# Altium PCB PCB.PcbDoc
Units mm, origin at the board's own origin, x right, y up, seen from the top; angles counter-clockwise.
Board outline 35 x 35 mm, 2 copper layers (L1, L2), stack 1.52 mm thick; 37 components, 31 nets, 124 pads, 25 vias.
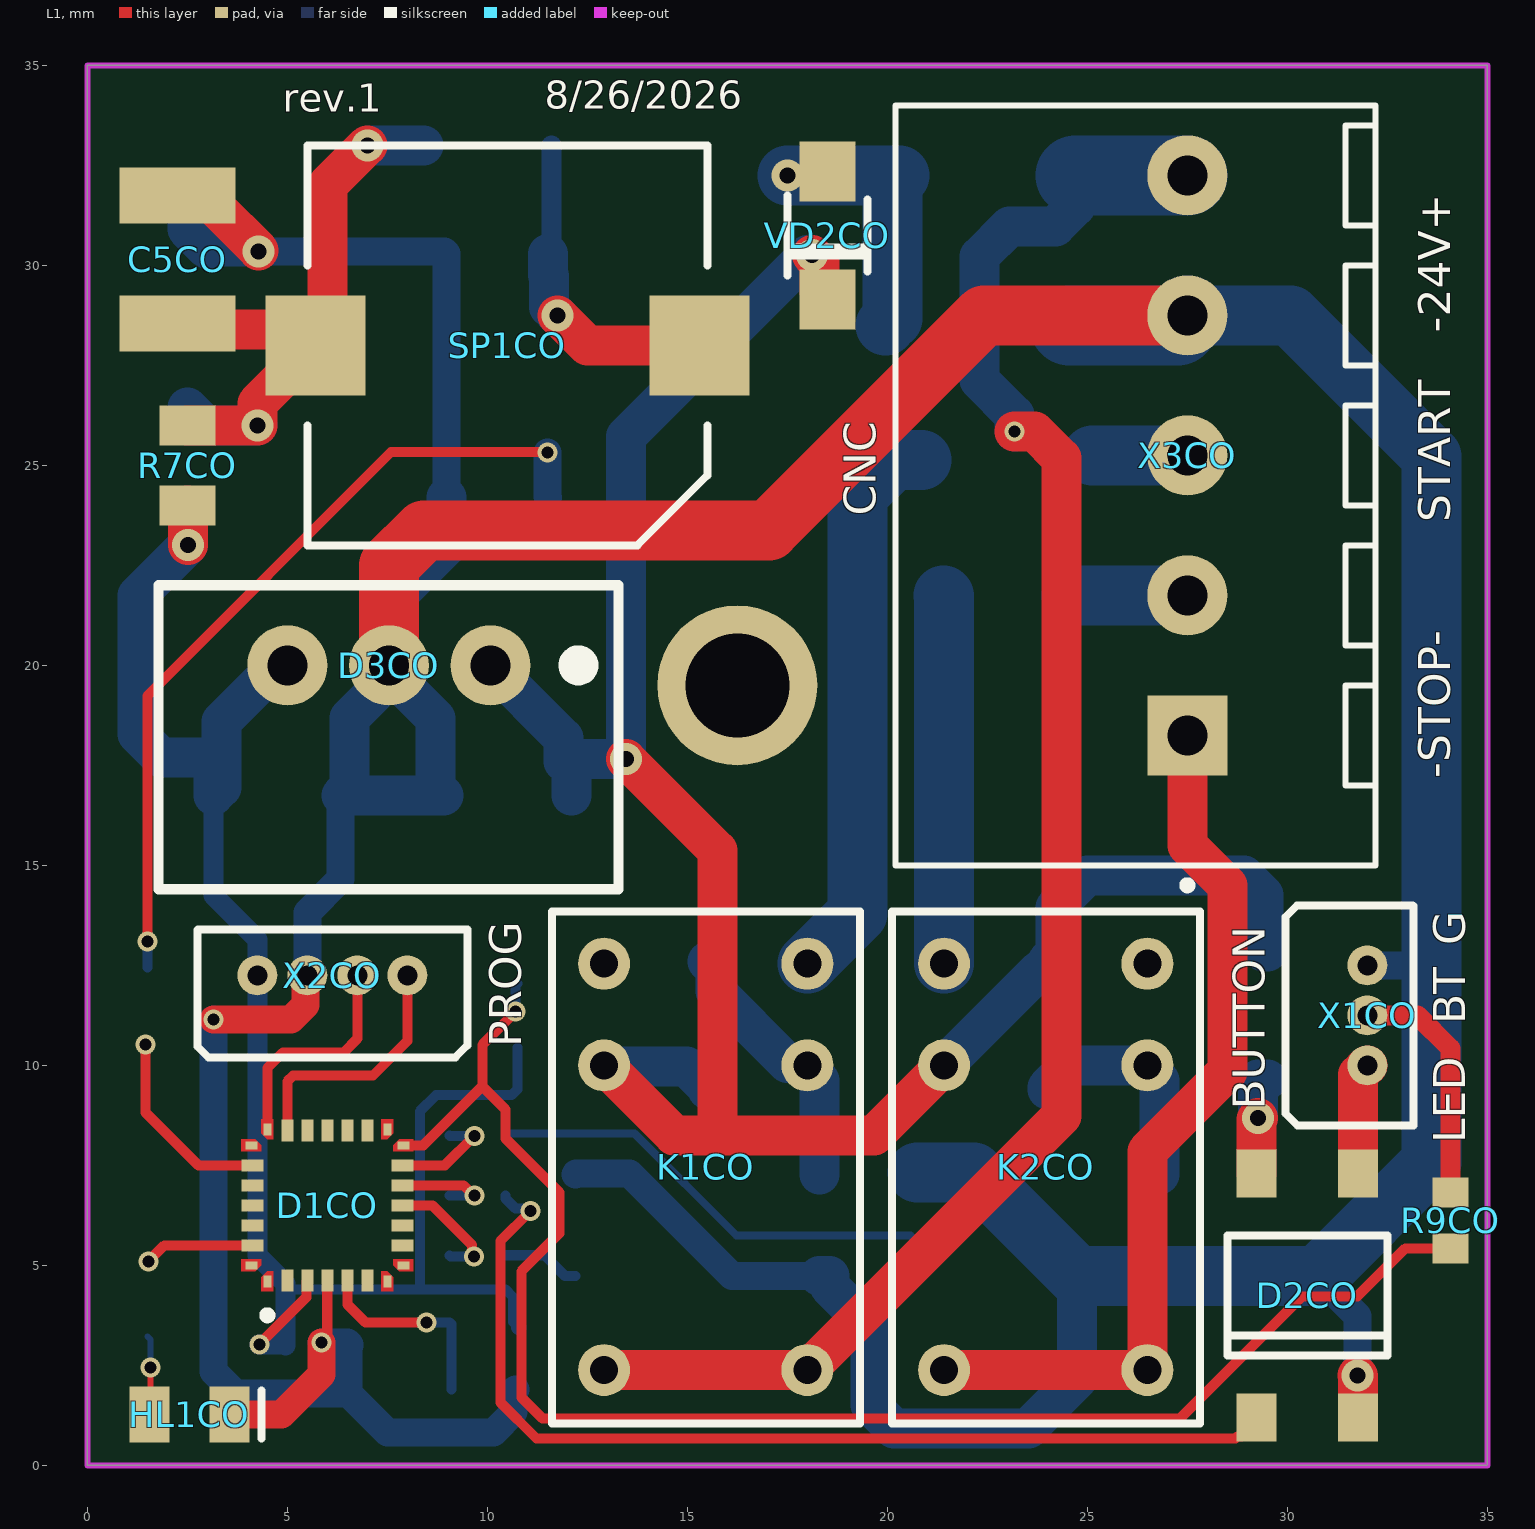
[diagram p0: L1 view]
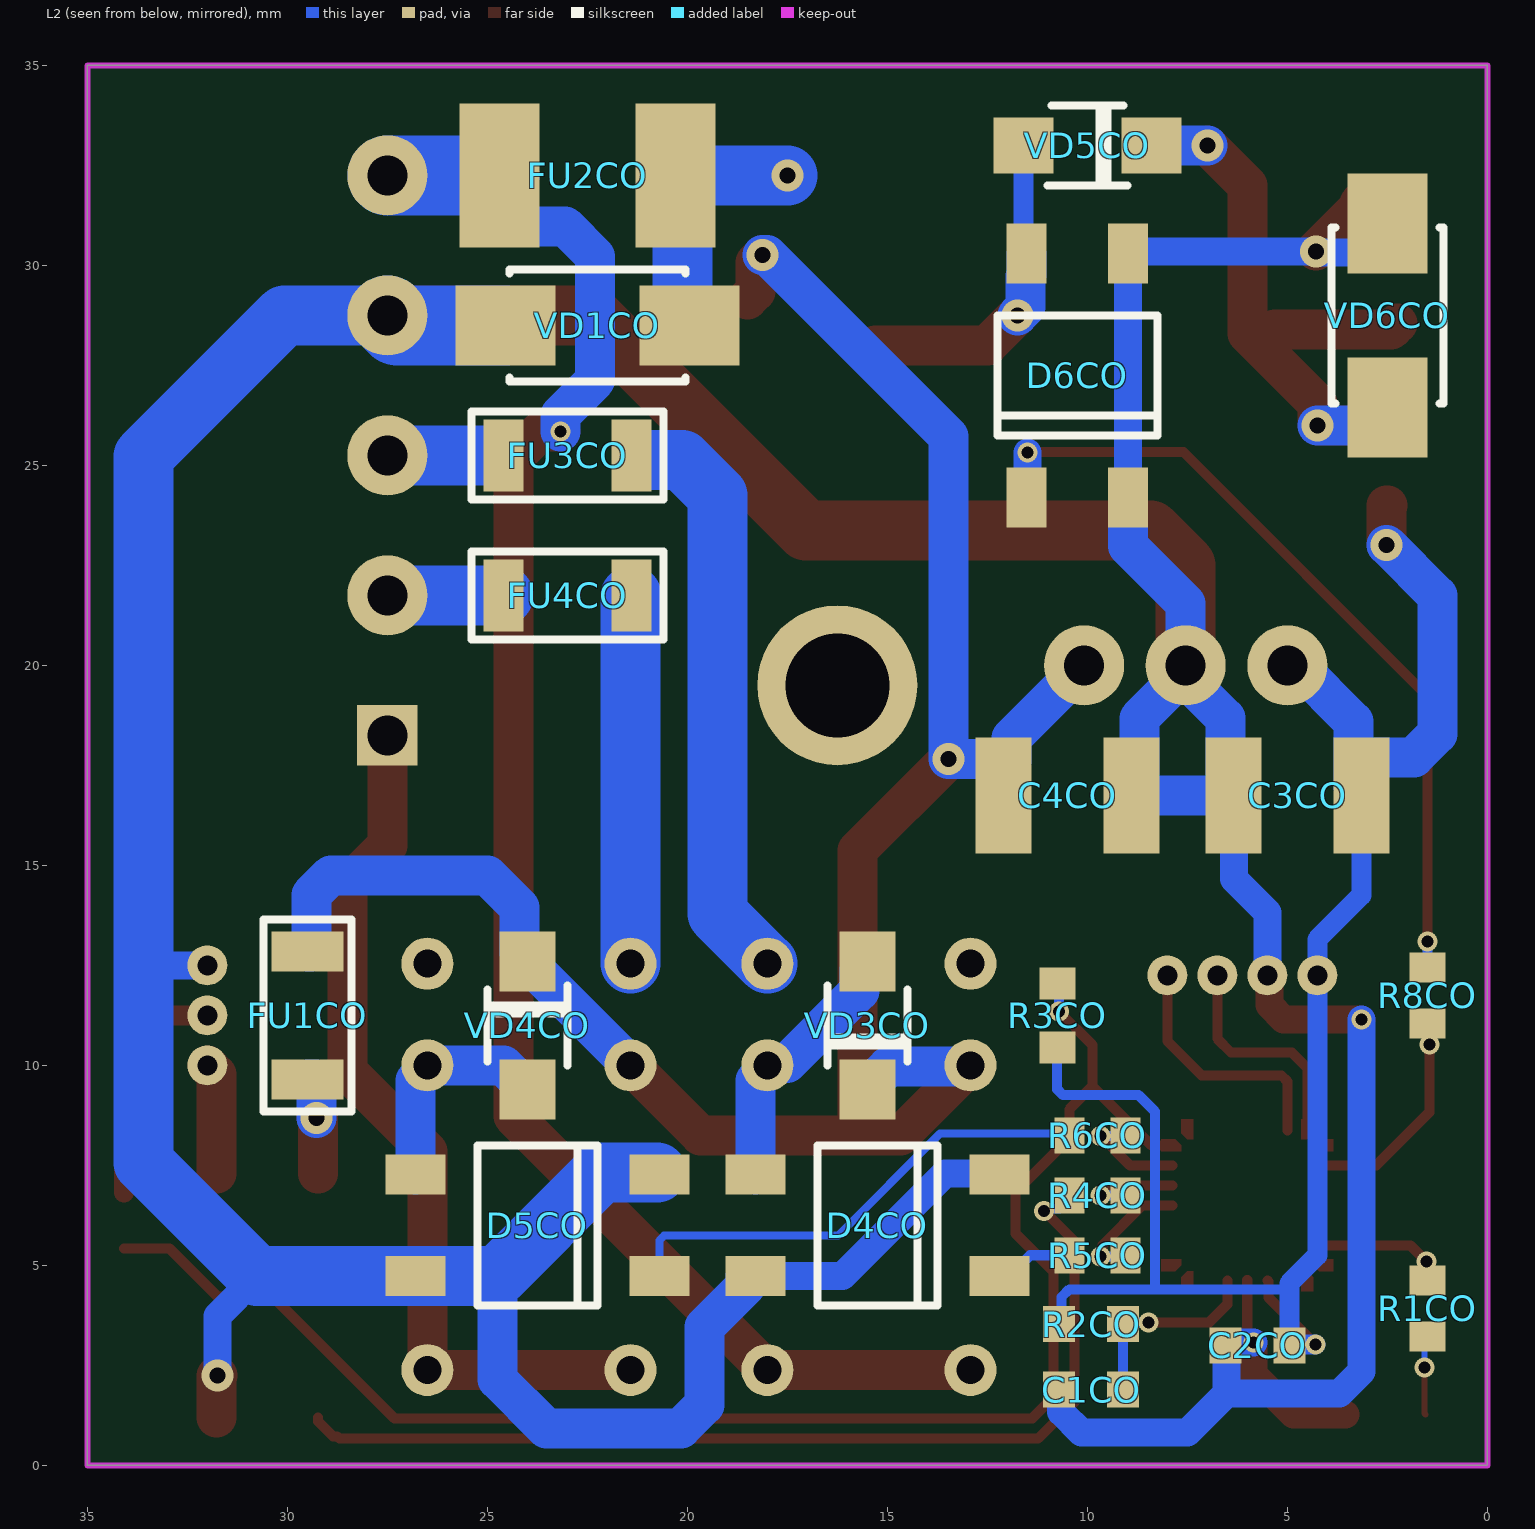
[diagram p1: L2 view, seen from below]
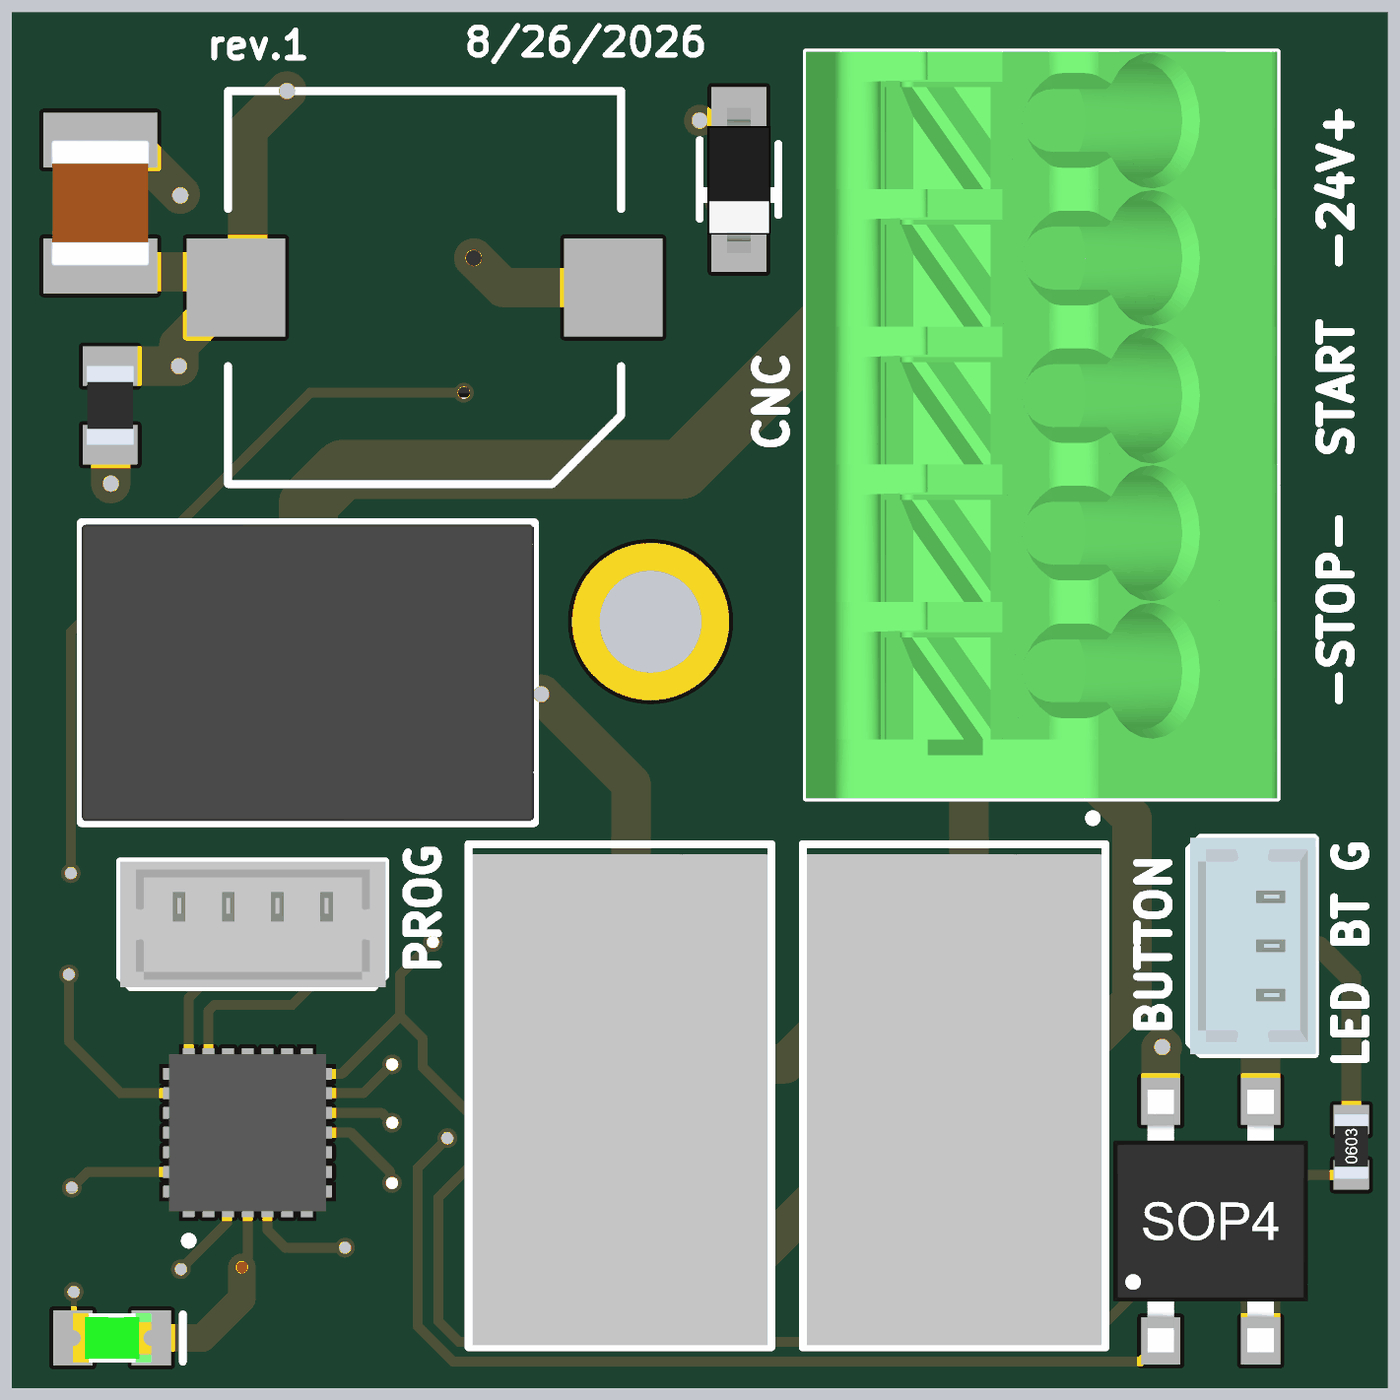
[diagram p2: 3D render of the assembled board from above, using the file's embedded part models]
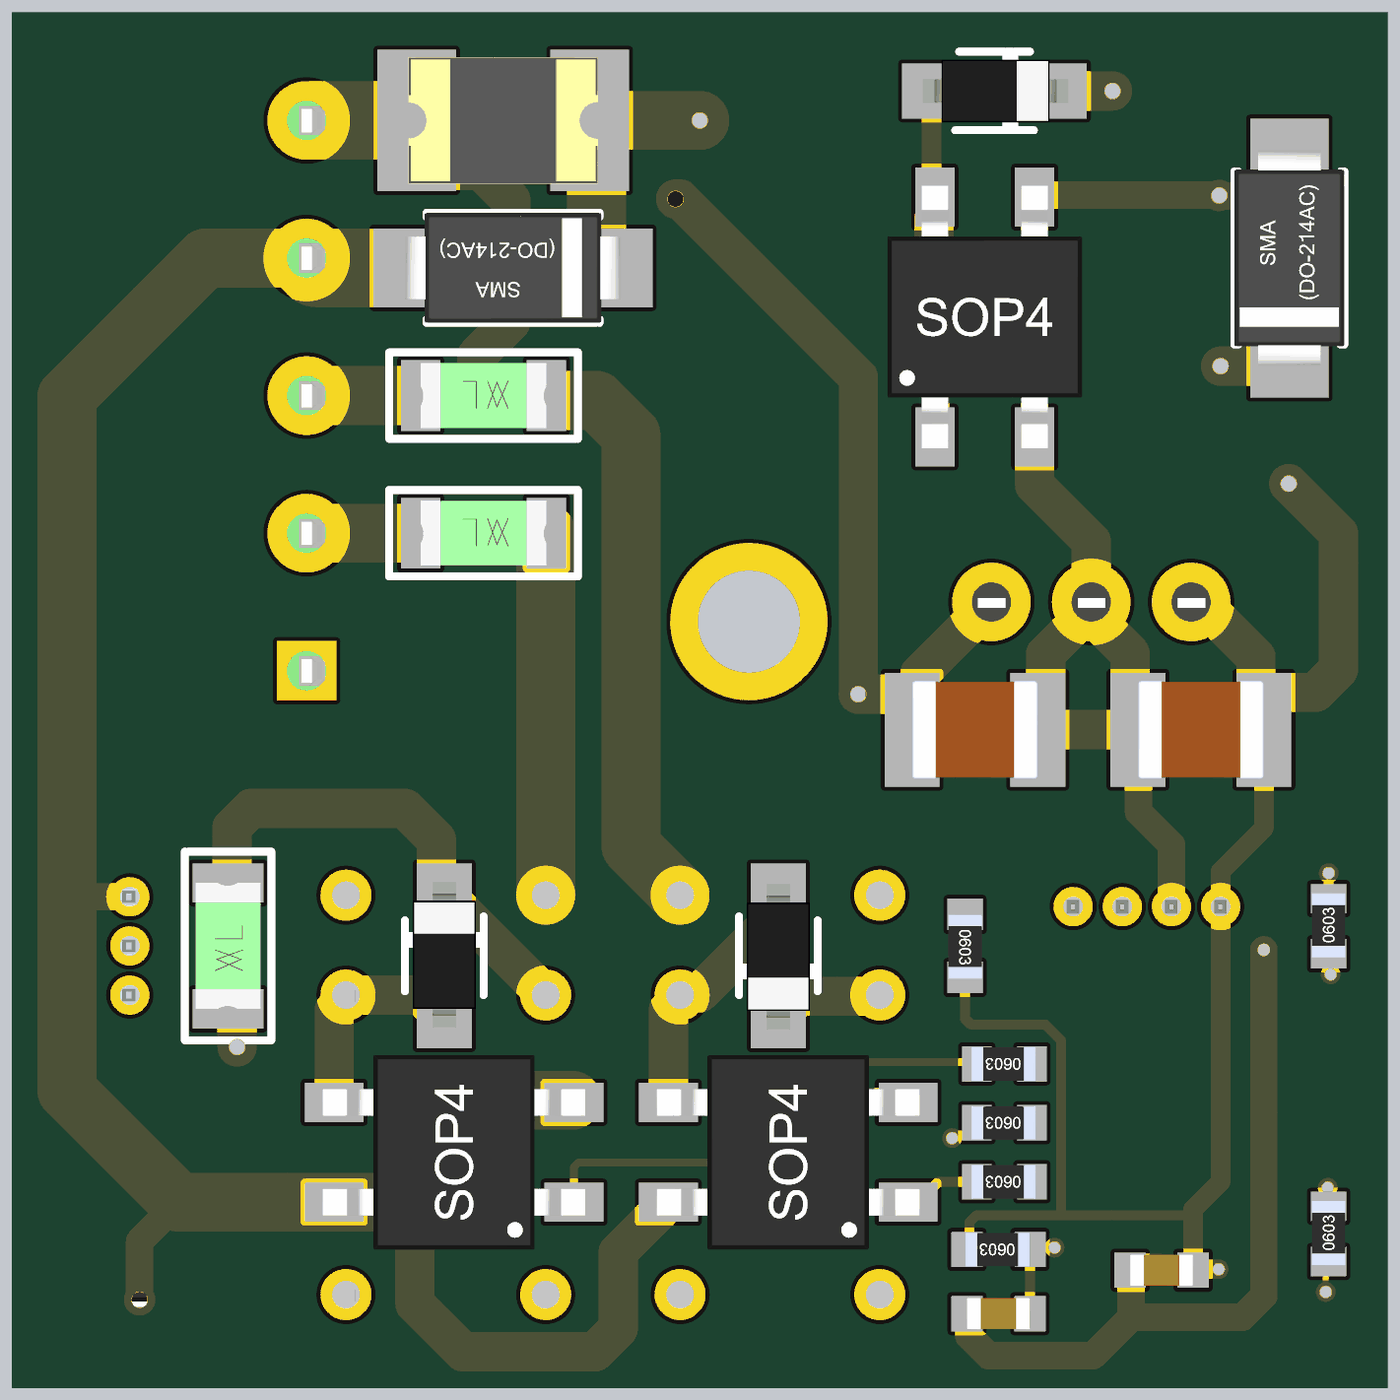
[diagram p3: 3D render of the assembled board from below, using the file's embedded part models]

## Layer stack, top to bottom
Top Solder: solder mask 0.0102, Solder Resist, Dk 3.8
L1: signal copper 0.035
Dielectric 4: core 1.45, PP-006, Dk 4.1
L2: signal copper 0.035
Board Layer Stack Bottom Solder: solder mask 0.0102, Solder Resist, Dk 3.8

## Board outline
0,0 0,35 35,35 35,0

## Design rules (kind name [scope] priority, off if disabled: settings)
AssemblyTestPointUsage [All] p1 off:
AssemblyTestpoint [All] p1 off: testpointundercomponent=TRUE minsize=1.016 maxsize=2.54 preferedsize=1.524 minholesize=0 maxholesize=1.016 preferedholesize=0.813 testpointgrid=0.025 usegrid=TRUE gridtolerance=0 allowsidetop=TRUE allowsidebottom=TRUE
Clearance [All] p1: gap=0.127 ignorepadtopadclearanceinfootprint=FALSE
ComponentClearance [All] p1: gap=0.2 collisioncheckmode=3 verticalgap=0.2 showdistances=FALSE
DiffPairsRouting DiffPairs_ETH90 [All] p1: maxlimit=0.25 minlimit=0.25 mostfreqgap=0.25 toplayer_minwidth=0.14 toplayer_maxwidth=0.14 toplayer_prefwidth=0.14 bottomlayer_minwidth=0.14 bottomlayer_maxwidth=0.14 bottomlayer_prefwidth=0.14 maxuncoupledlength=12.7
FabricationTestPointUsage [All] p1 off: valid=0 allowmultiple=FALSE
FabricationTestpoint [All] p1 off: side=3 testpointundercomponent=TRUE minsize=1.016 maxsize=2.54 preferedsize=1.524 minholesize=0 maxholesize=1.016 preferedholesize=0.813 testpointgrid=0.025 allowsidetop=TRUE allowsidebottom=TRUE usegrid=TRUE gridtolerance=0
HoleSize [All] p1: absolutevalues=TRUE maxlimit=10 minlimit=0.025 maxpercent=80.000 minpercent=20.000
MinimumSolderMaskSliver [All] p1: minsoldermaskwidth=0.006
PolygonConnect DirCon [IsNamedPolygon('DIR')] p1: connectstyle=Direct reliefconductorwidth=0.254 reliefentries=4 polygonreliefangle="90 Angle" airgapwidth=0.254
PolygonConnect [All] p2: thpad.connectstyle=Relief thpad.reliefconductorwidth=0.254 thpad.reliefentries=4 thpad.polygonreliefangle="90 Angle" thpad.airgapwidth=0.254 smdpad.connectstyle=Relief smdpad.reliefconductorwidth=0.254 smdpad.reliefentries=4 smdpad.polygonreliefangle="90 Angle" smdpad.airgapwidth=0.254 via.connectstyle=Direct via.reliefconductorwidth=0.254 via.reliefentries=4 via.polygonreliefangle="90 Angle" via.airgapwidth=0.254
RoutingVias [All] p1: holewidth=0.4 width=0.8 viastyle="Through Hole" minholewidth=0.3 minwidth=0.5 maxholewidth=0.6 maxwidth=1.2
SilkToSilkClearance [All] p1: silktosilkclearance=0.05
SilkToSolderMaskClearance [IsPad] p1: minsilkscreentomaskgap=0.07 clearancetoexposedcopper=TRUE
SolderMaskExpansion [All] p1: expansion=0.102 istentingtop=FALSE
SupplyNets "Schematic Supply Nets_7" [InNet('24V')] p1: voltage=0.000
SupplyNets "Schematic Supply Nets_3" [InNet('GND')] p2: voltage=0.000
SupplyNets "Schematic Supply Nets_2" [InNet('3.3V')] p3: voltage=0.000
Width [All] p1: maxlimit=5 minlimit=0.127 preferedwidth=0.15
20 further rules are at their usual default settings.

## Components (designator, comment, footprint, x,y, rotation, side; value= is the part's Value field where it differs from the comment)
C1CO "CL10B104KB8NNNC" C0603pads 9.902,1.895 r0 bottom value=0.1uF
C2CO "CL10B104KB8NNNC" C0603pads 5.75,3 r0 bottom value=0.1uF
C3CO "C3225X8R1E106K250AC" "C1210 LowESR" 4.75,16.75 r180 bottom value="10uF 25V"
C4CO "C3225X8R1E106K250AC" "C1210 LowESR" 10.5,16.75 r0 bottom value="10uF 25V"
C5CO "C3225X8R1E106K250AC" "C1210 LowESR" 2.25,30.15 r270 top value="10uF 25V"
D1CO "STM32G071GBU6" UFQFPN28 6,6.5 r90 top
D2CO "CPC1014NTR" SOP-4#1 30.5,4.25 r90 top value="60V 0.4A"
D3CO "R-78E3.3-0.5" R-78XX-0.5 10.08,20 r180 top
D4CO "CPC1014NTR" SOP-4#2 15.25,6 r0 bottom value="60V 0.4A"
D5CO "CPC1014NTR" SOP-4#2 23.75,6 r0 bottom value="60V 0.4A"
D6CO "CPC1014NTR" SOP-4#2 10.25,27.25 r90 bottom value="60V 0.4A"
FU1CO "0ZCJ0012FF2E" "FUSE 1206" 29.5,11.25 r90 bottom value="0.12 A"
FU2CO "1812L150/24MR" "FUSE 1812" 22.5,32.25 r180 bottom value="24V 1.5A"
FU3CO "0ZCJ0012FF2E" "FUSE 1206" 23,25.25 r0 bottom value="0.12 A"
FU4CO "0ZCJ0012FF2E" "FUSE 1206" 23,21.75 r0 bottom value="0.12 A"
HL1CO "KT-0805G" "LED 0805 GREEN" 2.55,1.275 r0 top
K1CO "G5V-1-DC24" G5V-1 12.92,12.54 r270 top
K2CO "G5V-1-DC24" G5V-1 21.42,12.54 r270 top
R1CO "RC0603FR-071KL" R0603_MIN_pads 1.5,3.923 r90 bottom value=1K
R2CO "RC0603FR-0710KL" R0603_pads 9.902,3.528 r0 bottom value=10K
R3CO "RC0603FR-0710KL" R0603_pads 10.75,11.25 r270 bottom value=10K
R4CO "RC0603FR-071KL" R0603_MIN_pads 9.75,6.75 r0 bottom value=1K
R5CO "RC0603FR-071KL" R0603_MIN_pads 9.75,5.25 r0 bottom value=1K
R6CO "RC0603FR-071KL" R0603_MIN_pads 9.75,8.25 r0 bottom value=1K
R7CO "RC0805FR-0710RL" R0805 2.5,25 r270 top value=10E
R8CO "RC0603FR-071KL" R0603_MIN_pads 1.5,11.75 r90 bottom value=1K
R9CO "RC0603FR-071KL" R0603_MIN_pads 34.078,6.125 r90 top value=1K
SP1CO "MLT-9650" buzer_9.6x9.6 10.5,28 r90 top
VD1CO "SMAJ30CA-TR" SMAJ 22.25,28.5 r180 bottom value=33V
VD2CO "PMEG6010ER,115" SOD123 18.5,30.75 r90 top value="60V 1A"
VD3CO "PMEG6010ER,115" SOD123 15.5,11 r90 bottom value="60V 1A"
VD4CO "PMEG6010ER,115" SOD123 24,11 r270 bottom value="60V 1A"
VD5CO "PMEG6010ER,115" SOD123 10,33 r0 bottom value="60V 1A"
VD6CO "SMAJ5.0CA-13-F" SMAJ 2.5,28.75 r270 bottom
X1CO "0530470310" 0530470310 32,10 r90 top
X2CO "0530470410" 0530470410 8,12.25 r180 top locked
X3CO "1984992" 1984992 32.2,15 r90 top

## Footprints (in the part's own frame and the unit in brackets; to place one, negate y for a bottom-side part, rotate by r counter-clockwise, add the part's x,y. Pads: shape width x height; smd on the part's side, far side on the other; paste and mask are expansions set on the pad)
1984992 [mm]
  rect 2x2 / inner round 1.508 / far side rect 1.508x1.508 hole 1: 1(3.25,4.7)
  round 2 hole 1: 2(6.75,4.7) 3(10.25,4.7) 4(13.75,4.7) 5(17.25,4.7)
  silkscreen extent -0.6,0 19,12, body extent 0,0 19,12, height 13.12
0530470310 [mm]
  round 1 hole 0.5: 1(0,0) 2(1.25,0) 3(2.5,0)
  silkscreen extent -1.5,-1.15 4,2.05, body extent -1.5,-1.17 4,2.03, height 4.25
0530470410 [mm]
  round 1 hole 0.5: 1(0,0) 2(1.25,0) 3(2.5,0) 4(3.75,0)
  silkscreen extent -1.5,-1.15 5.25,2.05, body extent -1.5,-1.14 5.25,2.06, height 4.28
buzer_9.6x9.6 [mm]
  rect 2.5x2.5 smd: 1(0,4.8) 2(0,-4.8)
  silkscreen extent -5,-5 5,5, body extent -4.75,-4.5 4.75,4.75, height 3
C0603pads [mm]
  rect 0.8x0.9 smd: 1(-0.8,0) 2(0.8,0)
  body extent -0.8,-0.4 0.8,0.4, height 0.9
"C1210 LowESR" [mm]
  rect 1.4x2.9 smd: 1(-1.6,0) 2(1.6,0)
  body extent -1.6,-1.25 1.6,1.25, height 2.7
"FUSE 1206" [mm]
  rect 1x1.8 smd: 1(-1.6,0) 2(1.6,0)
  silkscreen extent -2.4,-1.1 2.4,1.1, body extent -1.6,-0.83 1.6,0.83, height 0.56
"FUSE 1812" [mm]
  rect 2x3.6 smd: 1(-2.2,0) 2(2.2,0)
  body extent -2.41,-1.61 2.41,1.61, height 1.32
G5V-1 [mm]
  round 1.3 hole 0.7: 1(0,0) 2(2.54,0) 5(10.16,0) 6(10.16,5.08) 9(2.54,5.08) 10(0,5.08)
  silkscreen extent -1.3,-1.3 11.5,6.4, body extent -1.05,-1.2 11.45,6.3, height 10.1
"LED 0805 GREEN" [mm]
  rect 1x1.4 smd: 1(-1,0) 2(1,0)
  silkscreen extent 1.8,-0.6 1.8,0.6, body extent -1,-0.63 1,0.63, height 1.1
R0603_MIN_pads [mm]
  rect 0.75x0.9 smd: 1(-0.7,0) 2(0.7,0)
  body extent -0.8,-0.42 0.84,0.43, height 0.46
R0603_pads [mm]
  rect 0.8x0.9 smd: 1(-0.8,0) 2(0.8,0)
  body extent -0.8,-0.42 0.84,0.43, height 0.46
R0805 [mm]
  rect 1x1.4 smd: 1(-1,0) 2(1,0)
  body extent -1,-0.6 1,0.6, height 0.5
R-78XX-0.5 [mm]
  round 2 hole 1: 1(0,0) 2(2.54,0) 3(5.08,0)
  silkscreen extent -3.2,-2 8.3,5.6, body extent -3.2,-1.97 8.3,5.57, height 10.34
SMAJ [mm]
  rect 2.5x2 smd: 1(-2.3,0) 2(2.3,0)
  silkscreen extent -2.2,-1.4 2.2,1.4, body extent -2.75,-1.4 2.75,1.4, height 2.6
SOD123 [mm]
  rect 1.5x1.4 smd: 1(-1.6,0) 2(1.6,0)
  silkscreen extent -1,-1 1,1, body extent -1.88,-0.8 1.82,0.8, height 1.27
SOP-4#1 [mm] "SOP, 4-Leads, Pitch 2,54mm"
  rect 1.2x1 smd: 1(-3.05,1.27) 2(-3.05,-1.27) 3(3.05,-1.27) 4(3.05,1.27)
  silkscreen extent -1.5,-2 1.5,2, body extent -3.34,-2.47 3.34,2.47, height 2.9
SOP-4#2 [mm] "SOP, 4-Leads, Pitch 2,54mm"
  rect 1.5x1 smd: 1(-3.05,1.27) 2(-3.05,-1.27) 3(3.05,-1.27) 4(3.05,1.27)
  silkscreen extent -1.5,-2 1.5,2, body extent -3.34,-2.47 3.34,2.48, height 2.9
UFQFPN28 [mm]
  rect 0.3x0.2 smd paste-1 mask+0: 1(-1.9,1.5) 7(-1.9,-1.5) 15(1.9,-1.5) 21(1.9,1.5)
  rect 0.55x0.3 smd: 2(-1.875,1) 3(-1.875,0.5) 4(-1.875,0) 5(-1.875,-0.5) 6(-1.875,-1) 16(1.875,-1) 17(1.875,-0.5) 18(1.875,0) 19(1.875,0.5) 20(1.875,1)
  rect 0.2x0.3 smd paste-1 mask+0: 8(-1.5,-1.9) 14(1.5,-1.9) 22(1.5,1.9) 28(-1.5,1.9)
  rect 0.3x0.55 smd: 9(-1,-1.875) 10(-0.5,-1.875) 11(0,-1.875) 12(0.5,-1.875) 13(1,-1.875) 23(1,1.875) 24(0.5,1.875) 25(0,1.875) 26(-0.5,1.875) 27(-1,1.875)
  L1 region: 1.65,-1.8 1.65,-2.15 1.35,-2.15 1.35,-1.65 1.5,-1.65
  L1 region: 2.15,1.35 1.65,1.35 1.65,1.5 1.8,1.65 2.15,1.65
  L1 region: -1.65,1.5 -1.65,1.35 -2.15,1.35 -2.15,1.65 -1.8,1.65
  L1 region: -1.65,-1.5 -1.8,-1.65 -2.15,-1.65 -2.15,-1.35 -1.65,-1.35
  L1 region: -1.35,-2.15 -1.65,-2.15 -1.65,-1.8 -1.5,-1.65 -1.35,-1.65
  L1 region: 2.15,-1.65 1.8,-1.65 1.65,-1.5 1.65,-1.35 2.15,-1.35
  L1 region: 1.65,1.8 1.5,1.65 1.35,1.65 1.35,2.15 1.65,2.15
  L1 region: -1.35,1.65 -1.5,1.65 -1.65,1.8 -1.65,2.15 -1.35,2.15
  silkscreen extent -2.85,1.4 -2.65,1.6, body extent -2,-2 2,2, height 0.61

## Part data
C1CO C2CO: "CAP CER 0.1UF 50V X7R 0603 jlc", Manufacturer="Samsung Electro-Mechanics", Operating Temperature="-55°C ~ 85°C", Part Number=CL10B104KB8NNNC, Supplier 1=Farnell, Supplier 2=Digi-Key, Supplier 3=jlcpcb, Supplier Part Number 2=1276-1000-1-ND, Supplier Part Number 3=C1591
C3CO C4CO C5CO: "CAP CER 10UF 25V X8R 1210", Manufacturer="TDK Corporation", Operating Temperature="-55°C ~ 85°C", Part Number=C3225X8R1E106K250AC, Supplier 1=Mouser, Supplier 2=Digi-Key, Supplier 3=jlcpcb, Supplier Part Number 2=445-174832-1-ND
D1CO: "IC MCU 32BIT 128KB FLSH 28UFQFPN jlc", Manufacturer=STMicroelectronics, Operating Temperature="-40°C ~ 85°C", Part Number=STM32G071GBU6, Supplier 1=Farnell, Supplier 2=Digi-Key, Supplier 3=jlcpcb, Supplier Part Number 2=497-18343-ND, Supplier Part Number 3=C529347
D2CO D4CO D5CO D6CO: "SSR RELAY SPST-NO 400MA 0-60V jlc", Manufacturer="Littelfuse Inc.", Operating Temperature="-55°C ~ 110°C", Part Number=CPC1014NTR, Supplier 1=Farnell, Supplier 2=Digi-Key, Supplier 3=jlcpcb, Supplier Part Number 2=5656-CPC1014NTRCT-ND, Supplier Part Number 3=C2760365
D3CO: "DC DC CONVERTER 3.3V 2W", Manufacturer="Recom Power", Operating Temperature="-40°C ~ 85°C", Part Number=R-78E3.3-0.5, Supplier 1=Farnell, Supplier 2=Digi-key, Supplier 3=Mouser, Supplier Part Number 2=945-1661-5-ND
FU1CO FU3CO FU4CO: "PTC RESET FUSE 48V 120MA 1206 jlc", Manufacturer="Bel Fuse Inc.", Operating Temperature="-40°C ~ 85°C", Part Number=0ZCJ0012FF2E, Supplier 1=Farnell, Supplier 2=Digi-Key, Supplier 3=jlcpcb, Supplier Part Number 2=507-1795-1-ND, Supplier Part Number 3=C3761769
FU2CO: "PTC RESET FUSE 24V 1.5A 1812 jlc", Manufacturer="Littelfuse Inc.", Operating Temperature="-40°C ~ 85°C", Part Number=1812L150/24MR, Supplier 1=Farnell, Supplier 2=Digi-Key, Supplier 3=jlcpcb, Supplier Part Number 2=F3487CT-ND, Supplier Part Number 3=C142805
HL1CO: "LED EMERALD GREEN 0805 SMD jlc", Manufacturer="Hubei KENTO Elec", Operating Temperature="-55°C ~ 85°C", Part Number=KT-0805G, Supplier 1=Farnell, Supplier 2=Digi-Key, Supplier 3=jlcpcb, Supplier Part Number 3=C2297
K1CO K2CO: "RELAY GEN PURPOSE SPDT 1A 24VDC", Manufacturer=Omron, Operating Temperature="-40°C ~ 70°C", Part Number=G5V-1-DC24, Supplier 1=Farnell, Supplier 2=Digi-Key, Supplier 3=Mouser, Supplier 4=TME, Supplier Part Number 2=Z775-ND, Supplier Part Number 3=653-G5V-1-DC24
R1CO R4CO R5CO R6CO R8CO R9CO: "RES SMD 1K OHM 1% 1/10W 0603 jlc", Manufacturer=Yageo, Operating Temperature="-55°C ~ 155°C", Part Number=RC0603FR-071KL, Supplier 1=Farnell, Supplier 2=Digi-Key, Supplier 3=jlcpcb, Supplier Part Number 2=311-1.00KHRCT-ND, Supplier Part Number 3=C22548
R2CO R3CO: "RES 10K OHM 1% 1/10W 0603 jlc", Manufacturer=Yageo, Operating Temperature="-55°C ~ 155°C", Part Number=RC0603FR-0710KL, Supplier 1=Farnell, Supplier 2=Digi-Key, Supplier 3=jlcpcb, Supplier Part Number 2=311-10.0KHRCT-ND, Supplier Part Number 3=C98220
R7CO: "RES 10 OHM 1% 1/8W 0805 jlc", Manufacturer=Yageo, Operating Temperature="-55°C ~ 155°C", Part Number=RC0805FR-0710RL, Supplier 1=Farnell, Supplier 2=Digi-Key, Supplier 3=jlcpcb, Supplier Part Number 2=311-10.0CRCT-ND, Supplier Part Number 3=C96347
SP1CO: "85dB Active (Built-in Driver Circuit) Electromagnetic Type 2.7kHz Buzzers ROHS jlc", Manufacturer=Yageo, Operating Temperature="-55°C ~ 125°C", Part Number=MLT-9650, Supplier 1=Farnell, Supplier 2=Digi-Key, Supplier 3=jlcpcb, Supplier Part Number 3=C96127
VD1CO: "TVS DIODE 30VWM 64.3VC SMA", Manufacturer=STMicroelectronics, Operating Temperature="-55°C ~ 150°C (TJ)", Part Number=SMAJ30CA-TR, Supplier 1=Farnell, Supplier 2=Digi-Key, Supplier 3=Mouser, Supplier Part Number 2=497-7447-1-ND
VD2CO VD3CO VD4CO VD5CO: "DIODE SCHOTTKY 60V 1A SOD123W", Manufacturer="Nexperia USA Inc.", Operating Temperature="-65°C ~ 150°C", Part Number=PMEG6010ER,115, Supplier 1=Farnell, Supplier 2=Digi-Key, Supplier 3=Mouser, Supplier Part Number 2=1727-5846-1-ND
VD6CO: "TVS DIODE 5VWM 9.2VC SMA jlc", Manufacturer="Diodes Incorporated", Operating Temperature="-55°C ~ 150°C (TJ)", Part Number=SMAJ5.0CA-13-F, Supplier 1=Mouser, Supplier 2=Digi-Key, Supplier 3=jlcpcb, Supplier Part Number 2=SMAJ5.0CA-FDICT-ND, Supplier Part Number 3=C134993
X1CO: "CONN HEADER VERT 3POS 1.25MM jlc", Manufacturer=Molex, Operating Temperature=-, Part Number=0530470310, Supplier 1=Farnell, Supplier 2=Digi-Key, Supplier 3=jlcpcb, Supplier Part Number 2=WM1732-ND, Supplier Part Number 3=C122442
X2CO: "CONN HEADER VERT 4POS 1.25MM", Manufacturer=Molex, Operating Temperature=-, Part Number=0530470410, Supplier 1=Farnell, Supplier 2=Digi-Key, Supplier 3=jlcpcb, Supplier Part Number 2=WM1733-ND
X3CO: "TERM BLOCK 5POS 45DEG 3.5MM PCB", Manufacturer="Phoenix Contact", Operating Temperature=-, Part Number=1984992, Supplier 1=Farnell, Supplier 2=Digi-Key, Supplier 3=Mouser, Supplier Part Number 2=277-7675-ND

## Free pads (board coordinates)
  round 4 hole 2.6: 2(16.25,19.5)

## Via types
v1: diameter 0.5, hole 0.3, L1 to L2, tented both sides, 15 vias
v2: diameter 0.8, hole 0.4, L1 to L2, tented both sides, 10 vias

## Nets (pads, with @x,y where several pads share a name; then routed paths per layer and width w, separated by ;. In a path a pad name is that pad's centre, name@x,y a point inside that pad or via, vN(x,y) a via of type N, cw(c..) or ccw(c..) an arc to the next point about the centre after c; other vN are vias at no path point)
3.3V: C2CO.1 C3CO.2 D1CO.3 D3CO.3 R2CO.2 R3CO.2 R7CO.2 X2CO.4 | length 45.6
  L1 w0.25: v1(4.3,3.025) 5.475,4.2 5.475,4.6 D1CO.3
  L1 w1: R7CO.2 2.518,24 v2(2.518,23.011)
  L2 w0.25: 4.25,10.375 4.325,10.45 ; 4.95,4.55 5.1,4.4 8.312,4.4 ; R3CO.2@10.753,10.447 10.753,9.4 10.607,9.254 8.715,9.254 8.312,8.85 8.312,4.4 ; R2CO.2@10.78,3.45 R2CO.2 10.644,3.586 10.644,4.206 10.45,4.4 8.312,4.4
  L2 w0.381: R2CO.2@10.78,3.45 R2CO.2@10.783,3.447
  L2 w0.5: C3CO.2 3.15,14.25 4.25,13.15 X2CO.4 4.25,10.375 4.25,5.25 4.95,4.55 C2CO.1 4.925,3.025 v1(4.3,3.025)
  L2 w1: v2(2.518,23.011) 1.25,21.743 1.25,18.286 1.836,17.7 2.95,17.7 3.15,17.5 C3CO.2 3.35,16.95 3.35,18.594 4.756,20 D3CO.3
24V: C4CO.2 D3CO.1 FU1CO.2 K1CO.2 K2CO.2 VD2CO.1 VD3CO.1 VD4CO.1 | length 56.6
  L1 w1: K1CO.2 14.67,8.25 15.75,8.25 ; v2(13.467,17.654) 15.75,15.371 15.75,8.25 ; v2(18.115,30.252) 18.3,30.067 18.3,29.35 VD2CO.1 ; K2CO.2 19.67,8.25 15.75,8.25
  L2 w1: D3CO.1 11.9,18.18 C4CO.2@11.9,17.59 ; C4CO.2 12.1,17.454 12.3,17.654 v2(13.467,17.654) ; K1CO.2@12.951,9.969 14.981,9.969 15.5,9.45 VD3CO.1 ; v2@13.466,17.656 13.466,25.716 18.002,30.252 v2(18.115,30.252) ; K2CO.2 23.77,12.35 23.8,12.35 24,12.55 VD4CO.1 24.2,12.8 24.2,13.95 25,14.75 28.914,14.75 29.4,14.264 29.4,12.85 FU1CO.2
BUTTON_IN: D1CO.14 R3CO.1 R9CO.1 | length 39.7
  L1 w0.25: D1CO.14 8.4,8 9.875,9.475 ; v1(10.71,11.348) 9.875,10.513 9.875,9.475 ; R9CO.1 32.95,5.425 31.75,4.225 30.375,4.225 27.325,1.175 11.375,1.175 10.85,1.7 10.85,4.85 11.8,5.8 11.8,6.825 10.45,8.175 10.45,8.9 9.875,9.475
  L2 w0.25: v1(10.71,11.348) 10.71,12.01 R3CO.1
BUTTON_LED_ON: D1CO.12 R4CO.1 | length 2.5
  L1 w0.25: D1CO.12 9.405,7 9.654,6.751 v1(9.677,6.751)
  L2 w0.25: R4CO.1 9.051,6.751 v1(9.677,6.751)
BUZZER: D1CO.23 R8CO.1 | length 4.9
  L1 w0.25: v1(1.45,10.525) 1.45,8.825 2.775,7.5 D1CO.23
DEBUG_LED: D1CO.27 R1CO.2 | length 2.8
  L1 w0.25: v1(1.525,5.1) 1.925,5.5 D1CO.27
GND: C1CO.2 C2CO.2 C3CO.1 C4CO.1 C5CO.1 D1CO.4 D2CO.2 D3CO.2 D4CO.2 D4CO.4 D5CO.2 D5CO.4 D6CO.2 D6CO.3 HL1CO.2 VD1CO.1 VD6CO.1 X1CO.3 X2CO.3 X3CO.4 | length 158.2
  L1 w0.254: v1(5.85,3.075) 6,3.225 D1CO.4
  L1 w0.7: v1(3.15,11.15) 5.09,11.15 5.449,11.509 5.449,12.199 X2CO.3 ; HL1CO.2 4.85,1.275 5.85,2.275 v1(5.85,3.075)
  L1 w1: C5CO.1 3,31.75 3.2,31.55 3.2,31.458 v2@4.284,30.374 ; v2(31.75,2.25) 31.77,2.23 D2CO.2
  L1 w1.5: D3CO.2 7.54,22.496 8.419,23.374 17.038,23.374 22.414,28.75 X3CO.4
  L2 w0.254: C2CO.2 C2CO.2@6.575,3.025 ; C1CO.2 C1CO.2@10.75,1.942 ; D4CO.4@18.27,4.7 D4CO.4 ; D5CO.2 D5CO.2@20.753,7.323 ; 21.702,7.323 21.825,7.2
  L2 w0.7: VD6CO.1@2.5,30.95 VD6CO.1 2.5,30.973 3.15,30.323 v2@4.265,30.323 ; v1(3.15,11.15) 3.15,2.35 3.7,1.8 6.525,1.8 ; v2@4.293,30.351 8.929,30.351 D6CO.3 D6CO.2 ; X2CO.3 5.5,13.825 6.335,14.66 6.335,16.735 C3CO.1 ; v1(5.85,3.075) 6.5,3.075 6.55,3.025 C2CO.2 6.525,2.975 6.525,1.8 ; C1CO.2 10.652,1.845 10.652,1.327 10.15,0.825 7.5,0.825 6.525,1.8 ; D4CO.2 12.223,7.293 13.557,7.293 16.12,4.73 D4CO.4 ; 30.755,4.73 31.75,3.735 v2(31.75,2.25) ; X1CO.3 33.575,12.5 33.6,12.475
  L2 w1: VD6CO.1 2.5,30.902 VD6CO.1@3,30.402 ; D6CO.2 8.98,22.98 7.54,21.54 D3CO.2 ; D4CO.4 18.55,4.73 18.55,4.48 19.575,3.455 19.575,1.511 20.161,0.925 23.525,0.925 24.745,2.145 24.745,4.73 ; D3CO.2 7.54,19.835 8.7,18.675 8.7,16.95 C4CO.1 7.5,16.75 C3CO.1 6.55,16.95 6.55,18.678 7.349,19.477 7.349,19.809 D3CO.2
  L2 w1.5: D5CO.2@20.753,7.323 21.702,7.323 22.152,7.323 24.745,4.73 D5CO.4 30.755,4.73 33.6,7.575 33.6,12.475 33.6,25.225 30.075,28.75 X3CO.4
  L2 w2: VD1CO.1 27.25,28.5 X3CO.4
  other v2: 4.284,30.342
NetC1CO_1: C1CO.1 D1CO.5 R2CO.1 | length 5
  L1 w0.25: D1CO.5 6.5,4.025 6.95,3.575 v1(8.475,3.575)
  L2 w0.25: v1(8.475,3.575) 9.055,3.575 R2CO.1 C1CO.1
NetC5CO_2: C5CO.2 R7CO.1 SP1CO.1 VD5CO.1 VD6CO.2 | length 16.9
  L1 w1: C5CO.2 2.407,28.393 5.307,28.393 SP1CO.1 ; R7CO.1 v2(4.25,26) 4.25,26.55 SP1CO.1 ; v2(7,33) 6,32 6,28.3 SP1CO.1
  L2 w1: VD6CO.2 2.95,26 v2(4.25,26) ; v2(7,33) VD5CO.1
NetD2CO_1: D2CO.1 R4CO.2 | length 25.5
  L1 w0.25: v1(11.078,6.36) 10.325,5.607 10.325,1.575 11.229,0.671 28.701,0.671 28.755,0.725 28.855,0.725 29.23,1.1 D2CO.1
  L2 w0.25: R4CO.2 10.45,6.675 10.7,6.425 10.946,6.425 11.011,6.36 v1(11.078,6.36)
NetD2CO_3: D2CO.3 X1CO.1 | length 2.8
  L1 w1: D2CO.3 31.77,9.77 X1CO.1
NetD2CO_4: D2CO.4 FU1CO.1 | length 2.6
  L1 w1: D2CO.4 29.23,8.64 v2(29.269,8.679)
  L2 w1: v2(29.269,8.679) 29.269,9.65 FU1CO.1
NetD4CO_1: D4CO.1 R5CO.2 | length 2
  L2 w0.254: R5CO.2 11.43,5.25 11.95,4.73 D4CO.1
NetD4CO_3: D4CO.3 K1CO.9 VD3CO.2 | length 6.7
  L2 w1: VD3CO.2 15.7,12.4 15.7,11.86 17.503,10.057 17.943,10.057 K1CO.9 18,9.919 18.3,9.619 D4CO.3
NetD5CO_1: D5CO.1 R6CO.2 | length 12.3
  L2 w0.2: R6CO.2 10.493,8.293 13.682,8.293 16.236,5.739 20.583,5.739 20.7,5.622 D5CO.1
NetD5CO_3: D5CO.3 K2CO.9 VD4CO.2 | length 5.6
  L2 w1: VD4CO.2 24,9.45 24.2,9.65 24.25,9.65 24.6,10 K2CO.9 26.5,9.919 26.8,9.619 D5CO.3
NetD6CO_1: D6CO.1 R8CO.2 | length 20.4
  L1 w0.25: v1(1.5,13.1) 1.5,19.236 7.595,25.331 v1@11.494,25.331
  L2 w0.25: R8CO.2 v1(1.5,13.1)
  L2 w0.7: v1(11.5,25.325) 11.5,24.22 D6CO.1
NetD6CO_4: D6CO.4 SP1CO.2 VD5CO.2 | length 8.2
  L1 w1: v2(11.75,28.75) 12.5,28 SP1CO.2
  L2 w0.5: D6CO.4 11.6,30.38 VD5CO.2
  L2 w1: D6CO.4@11.52,30.278 11.52,29.757 11.542,29.735 11.542,28.958 v2(11.75,28.75)
NetFU2CO_1: FU2CO.1 K1CO.5 K1CO.6 X3CO.5 | length 43.4
  L1 w1: K1CO.5 K1CO.6 24.351,8.731 24.351,25.178 23.679,25.85 v1(23.175,25.85) ; X3CO.5 X3CO.5@27.713,32.25
  L2 w1: v1(23.175,25.85) 23.175,26.257 22.304,27.128 22.304,30.22 23.056,30.972 24.2,30.972 24.7,31.472 FU2CO.1
  L2 w2: FU2CO.1 X3CO.5
NetFU2CO_2: FU2CO.2 VD1CO.2 VD2CO.2 | length 6.7
  L2 w1.5: v2(17.5,32.25) FU2CO.2 20.125,32.075 20.125,28.675 VD1CO.2
NetFU3CO_1: FU3CO.1 K1CO.10 | length 14.2
  L2 w1.5: K1CO.10 19.25,13.79 19.25,24.25 20.129,25.129 20.85,25.129
NetFU3CO_2: FU3CO.2 X3CO.3 | length 2.4
  L2 w1.5: 25.125,25.25 X3CO.3
NetFU4CO_1: FU4CO.1 K2CO.1 | length 9.2
  L2 w1.5: FU4CO.1 21.42,21.73 K2CO.1
NetFU4CO_2: FU4CO.2 X3CO.2 | length 2.9
  L2 w1.5: FU4CO.2 X3CO.2
NetHL1CO_1: HL1CO.1 R1CO.1 | length 2
  L1 w0.15: HL1CO.1 1.574,1.299 v1(1.574,2.447)
  L2 w0.15: R1CO.1 1.574,3.149 v1(1.574,2.447)
NetK2CO_5: K2CO.5 K2CO.6 X3CO.1 | length 22.2
  L1 w1: K2CO.5 K2CO.6 26.5,7.852 28.5,9.852 28.5,14.5 27.5,15.5 X3CO.1
NetR9CO_2: R9CO.2 X1CO.2 | length 6
  L1 w0.5: X1CO.2 33.25,11.25 34.078,10.422 R9CO.2
START_RELAY: D1CO.11 R5CO.1 | length 3.1
  L1 w0.25: D1CO.11 8.625,6.5 9.622,5.503 9.622,5.265 v1(9.67,5.218)
  L2 w0.25: R5CO.1 9.082,5.218 v1(9.67,5.218)
STOP_RELAY: D1CO.13 R6CO.1 | length 2.7
  L1 w0.25: D1CO.13 8.937,7.5 v1(9.673,8.236)
  L2 w0.25: R6CO.1 9.064,8.236 v1(9.673,8.236)
SWCLK: D1CO.21 X2CO.2 | length 5.7
  L1 w0.25: D1CO.21 4.5,9.936 4.888,10.323 6.409,10.323 6.75,10.665 X2CO.2
SWDIO: D1CO.20 X2CO.1 | length 6.3
  L1 w0.25: D1CO.20 5,9.602 5.146,9.748 7.14,9.748 8,10.608 X2CO.1
pads on no net: D1CO.1 D1CO.2 D1CO.6 D1CO.7 D1CO.8 D1CO.9 D1CO.10 D1CO.15 D1CO.16 D1CO.17 D1CO.18 D1CO.19 D1CO.22 D1CO.24 D1CO.25 D1CO.26 D1CO.28 K1CO.1 K2CO.10

## Keep-outs
Keep-Out Layer:
  the board outline again, w0.15

## Silkscreen, mask and mechanical layers (free items; w line width, h text height)
Top Overlay:
  text "8/26/2026" at 11.44,33.915 h0.7
  text "rev.1" at 4.89,33.84 h0.7
  text "-24V+" at 34.073,28.315 h0.8 r90
  text "CNC" at 19.709,23.745 h0.8 r90
  text "START" at 34.073,23.577 h0.8 r90
  text "-STOP-" at 34.073,17.178 h0.8 r90
  text "G" at 34.45,12.999 h0.8 r90
  text "BT" at 34.45,11.025 h0.8 r90
  text "PROG" at 10.849,10.45 h0.8 r90
  text "BUTTON" at 29.437,8.89 h0.8 r90
  text "LED" at 34.45,8.052 h0.8 r90
Mechanical 2:
  drawing of 208 lines, arcs and shapes, not listed
Mechanical 15:
  drawing of 265 lines, arcs and shapes, not listed

## Dimensions
0,0 to 0,35 on Sizes
0,35 to 35,35 on Sizes